# EAGLE board MainBoard_scheme (EAGLE 9.5.2)
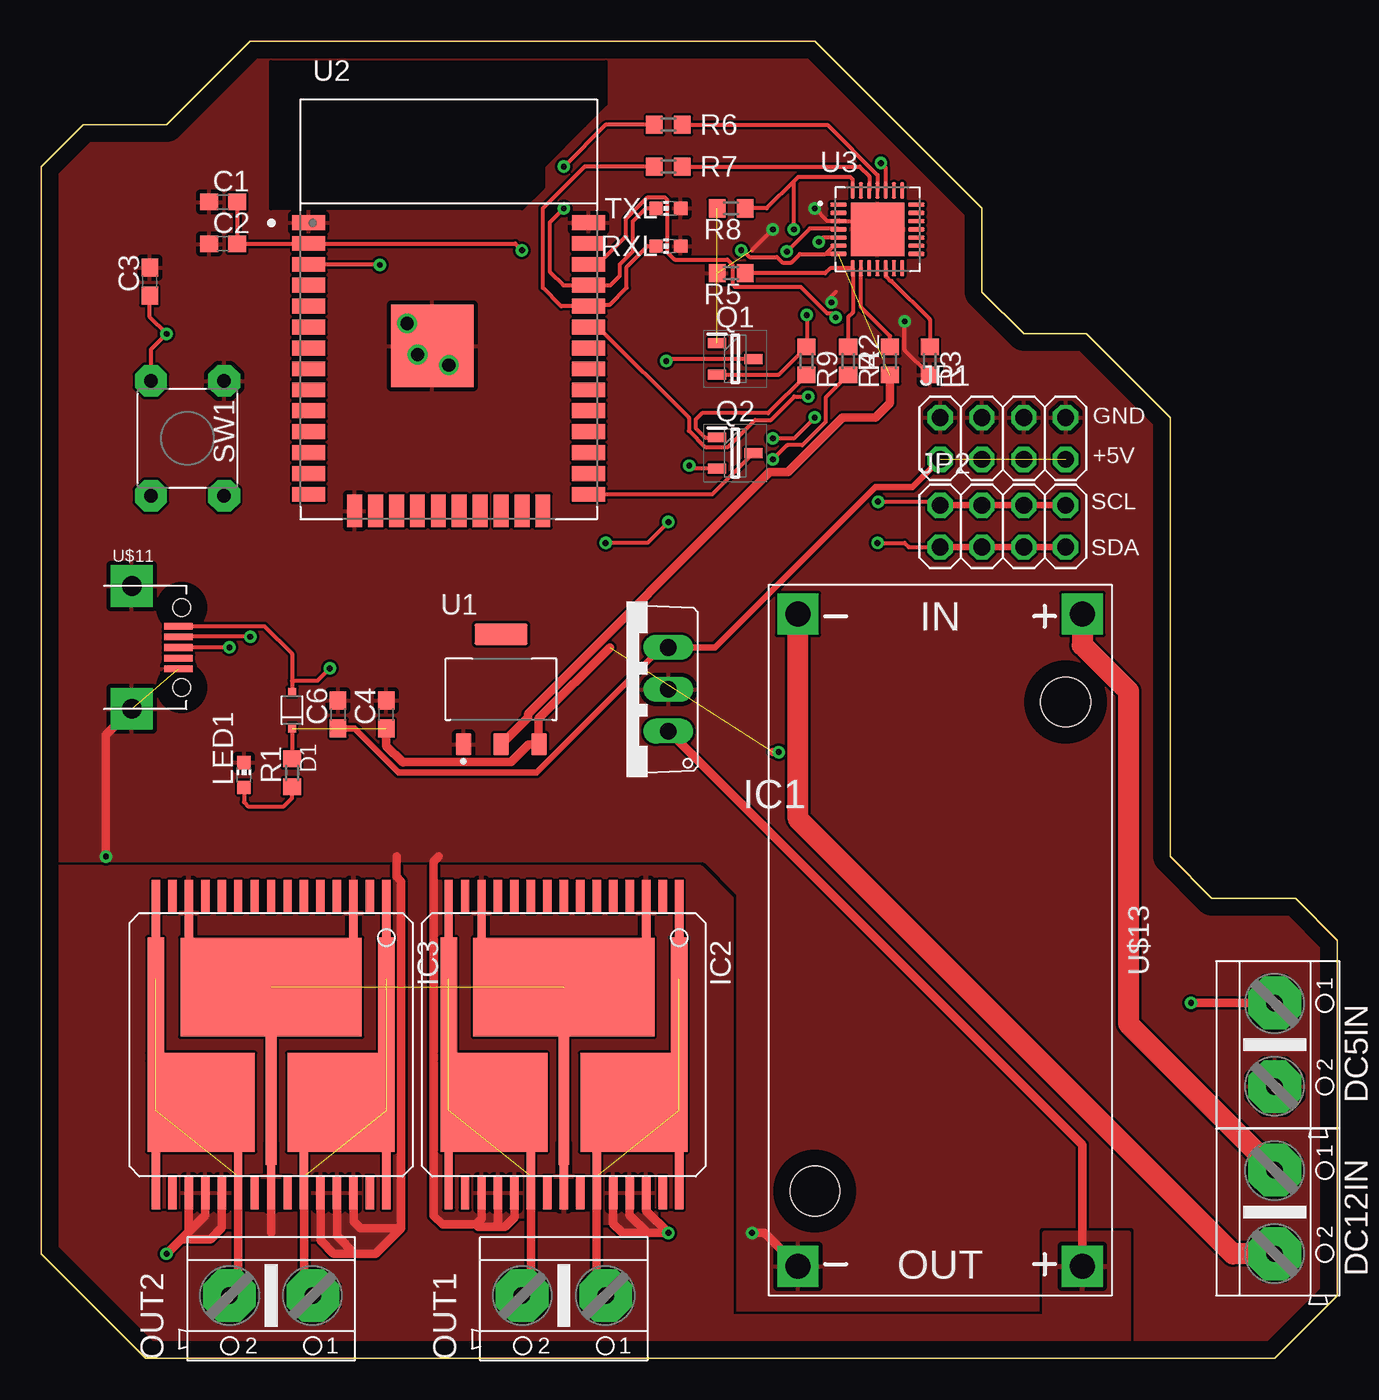
[diagram p0: board, top side]
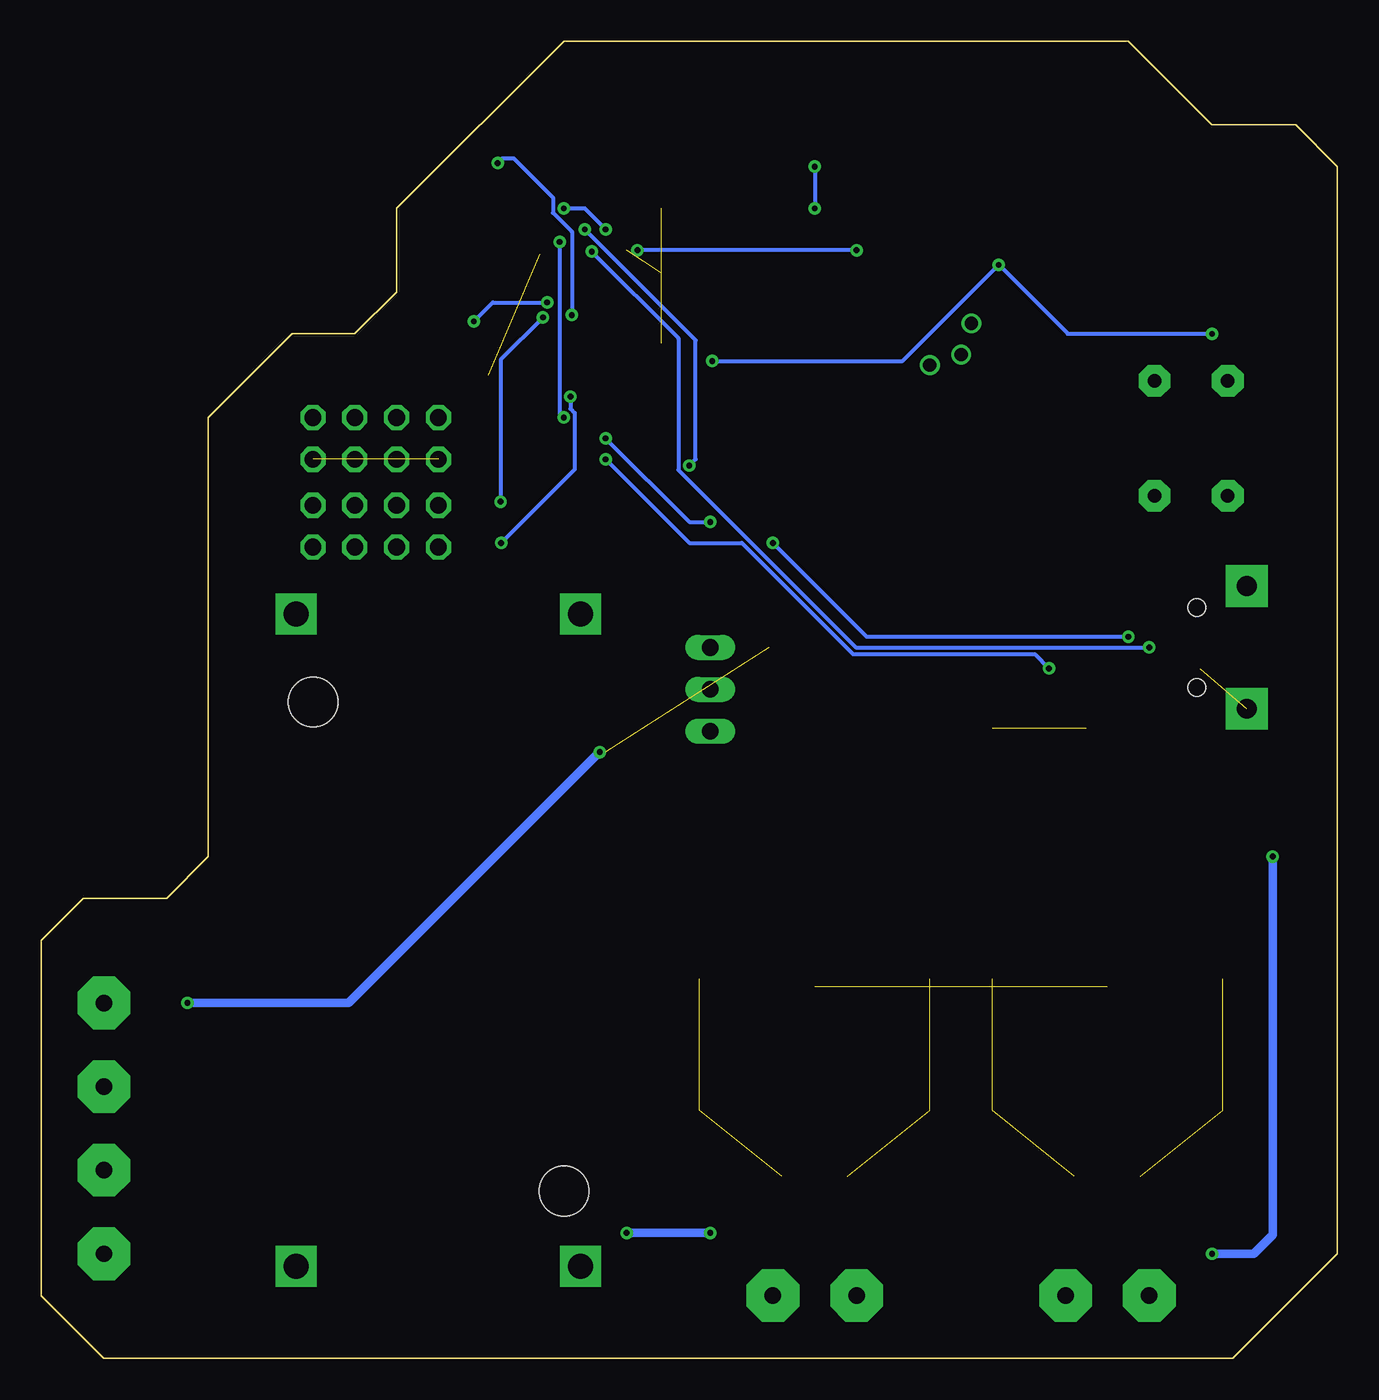
[diagram p1: board, bottom side, seen from below]

Size 78.74 x 80.01 mm. Coordinates in mm from the lower left corner, seen from the top.
Outline: 0,6.35 6.35,0 74.93,0 78.74,3.81 78.74,25.4 76.2,27.94 71.12,27.94 68.58,30.48 68.58,57.15 63.5,62.23 59.69,62.23 57.15,64.77 57.15,69.85 46.99,80.01 12.7,80.01 7.62,74.93 2.54,74.93 0,72.39 0,6.35
Copper layers (1*16): Top 0.035mm / dielectric 1.5mm / Bottom 0.035mm
Design rules "default": minimum track width 6mil, minimum drill 0.35mm, track to track 6mil, track to pad 6mil, pad to pad 6mil, via to via 6mil, smd to smd 6mil, copper to edge 40mil, drill to drill 6mil, minimum pad ring 10mil, minimum via ring 8mil, stop-mask expansion 4mil, vias tented up to drill 0mil, thermal gap 10mil
tRestrict: area 14,69.9 to 34.3,78.7

## Footprints (pad centres in the part's own frame; a part is rotated, then mirrored left to right if it is on the bottom)
C0603 = smd 1.1 x 1: 1 -0.85,0; 2 0.85,0
SOD323(F) = smd 0.5 x 0.5: 1 1.1,0; 2 -1.1,0
ARK500/2 = drill 1 pad 3.2 octagon: 1 -2.54,0; 2 2.54,0
TO220V = drill 1.016 long: 1 -2.54,-2.54; 2 0,-2.54; 3 2.54,-2.54
MULTIPOWERSO-30 = smd 0.508 x 12: 1 -7,-4; 15 7,-4; 16 7,4; 30 -7,4 | smd 0.508 x 2: 2 -6,-9; 4 -4,-9; 5 -3,-9; 6 -2,-9; 7 -1,-9; 8 0,-9; 9 1,-9; 10 2,-9; 11 3,-9; 12 4,-9; 14 6,-9; 17 6,9; 18 5,9; 19 4,9; 20 3,9; 22 1,9; 24 -1,9; 26 -3,9; 27 -4,9; 28 -5,9; 29 -6,9 | smd 0.508 x 4: 3 -5,-8; 13 5,-8; 21 2,8; 23 0,8; 25 -2,8 | smd 6.5 x 6: OUTA -4.25,3.5; OUTB 4.25,3.5 | smd 1 x 7.5: OUTA@1 -7,-2.755; OUTB@1 7,-2.755 | smd 11 x 6: VCC 0,-3.5 | smd 0.65 x 8.3: VCC@1 0,3.145
2X04 = drill 1.016 octagon: 1 -3.81,-1.27; 2 -3.81,1.27; 3 -1.27,-1.27; 4 -1.27,1.27; 5 1.27,-1.27; 6 1.27,1.27; 7 3.81,-1.27; 8 3.81,1.27
CHIP-LED0603 = smd 0.8 x 0.8: A 0,-0.75; C 0,0.75
SOT95P240X115-3N = smd 1.1 x 0.6: 1 -1.1,0.95; 2 -1.1,-0.95; 3 1.1,0
R0603 = smd 1 x 1.1: 1 -0.85,0; 2 0.85,0
P-B1720 = drill 0.813 pad 1.93 octagon: 1 -3.493,-2.223; 2 -3.493,2.223; 3 3.493,-2.223; 4 3.493,2.223
SOT229P700X180-4N = smd 0.93 x 1.31: 1 -2.29,-3.345; 2 0,-3.345; 3 2.29,-3.345 | smd 3.24 x 1.31: 4 0,3.345
MODULE_ESP32-WROOM-32D = smd 2 x 0.9: 1 -8.5,5.26; 2 -8.5,3.99; 3 -8.5,2.72; 4 -8.5,1.45; 5 -8.5,0.18; 6 -8.5,-1.09; 7 -8.5,-2.36; 8 -8.5,-3.63; 9 -8.5,-4.9; 10 -8.5,-6.17; 11 -8.5,-7.44; 12 -8.5,-8.71; 13 -8.5,-9.98; 14 -8.5,-11.25; 25 8.5,-11.25; 26 8.5,-9.98; 27 8.5,-8.71; 28 8.5,-7.44; 29 8.5,-6.17; 30 8.5,-4.9; 31 8.5,-3.63; 32 8.5,-2.36; 33 8.5,-1.09; 34 8.5,0.18; 35 8.5,1.45; 36 8.5,2.72; 37 8.5,3.99; 38 8.5,5.26 | smd 0.9 x 2: 15 -5.715,-12.25; 16 -4.445,-12.25; 17 -3.175,-12.25; 18 -1.905,-12.25; 19 -0.635,-12.25; 20 0.635,-12.25; 21 1.905,-12.25; 22 3.175,-12.25; 23 4.445,-12.25; 24 5.715,-12.25 | smd 5 x 5: 39 -1,-2.24
QFN50P500X500X80-29N = smd 1.01 x 0.27: 1 -2.36,1.5; 2 -2.36,1; 3 -2.36,0.5; 4 -2.36,0; 5 -2.36,-0.5; 6 -2.36,-1; 7 -2.36,-1.5; 15 2.36,-1.5; 16 2.36,-1; 17 2.36,-0.5; 18 2.36,0; 19 2.36,0.5; 20 2.36,1; 21 2.36,1.5 | smd 0.27 x 1.01: 8 -1.5,-2.36; 9 -1,-2.36; 10 -0.5,-2.36; 11 0,-2.36; 12 0.5,-2.36; 13 1,-2.36; 14 1.5,-2.36; 22 1.5,2.36; 23 1,2.36; 24 0.5,2.36; 25 0,2.36; 26 -0.5,2.36; 27 -1,2.36; 28 -1.5,2.36 | smd 3.25 x 3.25: 29 0,0
MICRO-USB = smd 0.4 x 1.75: 1 -1.3,4.525; 2 -0.65,4.525; 3 0,4.525; 4 0.65,4.525; 5 1.3,4.525 | drill 1.2 pad 2.54 square: GND1 -3.725,1.7; GND2 3.725,1.7 | hole 1.05: -2.425,4.73; 2.425,4.73
DC-DC-STEP-DOWN-LM2596 = drill 1.5 pad 2.5 square: IN+ -19.812,8.636; IN- -19.812,-8.636; OUT+ 19.812,8.636; OUT- 19.812,-8.636 | hole 3: -14.478,7.62; 15.24,-7.62

## Placement (x,y rotation side)
C1  0.1uF/50V  [C0603]  11.05,70.23 0 top
C2  4.7uF/6.3V  [C0603]  11.05,67.69 0 top
C3  0.1uF/50V  [C0603]  6.6,65.41 90 top
C4  22uF/10V  [C0603]  20.95,39.12 90 top
C6  0.1uF/50v  [C0603]  18.03,39.12 90 top
D1  BAT760  [SOD323(F)]  15.24,39.37 270 top
DC5IN  +5V  [ARK500/2]  74.93,19.05 270 top
DC12IN  +12V  [ARK500/2]  74.93,8.89 270 top
IC1  7805TV  [TO220V]  35.56,40.64 90 top
IC2  VNH3SP30  [MULTIPOWERSO-30]  31.75,19.05 180 top
IC3  VNH3SP30  [MULTIPOWERSO-30]  13.97,19.05 180 top
JP1  [2X04]  58.42,55.88 0 top
JP2  [2X04]  58.42,50.55 0 top
LED1  [CHIP-LED0603]  12.32,35.43 0 top
OUT1  ARK500/2  [ARK500/2]  31.75,3.81 180 top
OUT2  ARK500/2  [ARK500/2]  13.97,3.81 180 top
Q1  SS8050-G  [SOT95P240X115-3N]  42.16,60.71 0 top
Q2  SS8050-G  [SOT95P240X115-3N]  42.16,54.99 0 top
R1  2K  [R0603]  15.24,35.56 90 top
R2  2K  [R0603]  51.56,60.58 90 top
R3  10K  [R0603]  53.98,60.58 270 top
R4  10K  [R0603]  49.02,60.58 270 top
R5  10K  [R0603]  41.91,65.91 180 top
R6  0R  [R0603]  38.1,74.93 0 top
R7  0R  [R0603]  38.1,72.39 0 top
R8  10K  [R0603]  41.91,69.85 180 top
R9  10K  [R0603]  46.48,60.58 270 top
RXL  [CHIP-LED0603]  38.1,67.56 90 top
SW1  P-B1720  [P-B1720]  8.89,55.88 270 top
TXL  [CHIP-LED0603]  38.1,69.85 90 top
U1  AMS1117-3.3  [SOT229P700X180-4N]  27.94,40.64 0 top
U2  ESP32-WROOM-32D  [MODULE_ESP32-WROOM-32D]  24.76,63.73 0 top
U3  CP2102N-A01-GQFN28  [QFN50P500X500X80-29N]  50.8,68.58 0 top
U$11  MICRO-USB  [MICRO-USB]  3.81,43.18 270 top
U$13  DC-DC-STEP-DOWN-LM2596  [DC-DC-STEP-DOWN-LM2596]  54.61,25.4 270 top

## Library data of the parts
C1-C4 C6 = rcl; SPICEPREFIX: C
D1 = nxp_60_1_1
DC5IN DC12IN OUT1 OUT2 = #PaJa_konektory
IC1 = linear
IC2 IC3 = st-microelectronics; MPN: VNH3SP30-E; OC_FARNELL: 1739420; OC_NEWARK: 33R1486
JP1 JP2 = pinhead
LED1 RXL TXL = led
Q1 Q2 = SS8050-G; AVAILABILITY: Unavailable; DESCRIPTION: Bipolar _BJT_ Transistor NPN 25V 1.5A 100MHz 300mW Surface Mount SOT-23; MF: Comchip Technology; MP: SS8050-G; PACKAGE: TO-236 Comchip; PRICE: None
R1-R9 = rcl; SPICEPREFIX: R
SW1 = #PaJa_prepinace
U1 = AMS1117-3.3; AVAILABILITY: Unavailable; DESCRIPTION: Sot-89; MF: Advanced Monolithic Systems; MP: AMS1117-3.3; PACKAGE: SOT-89 ams; PRICE: None
U2 = ESP32-WROOM-32D; AVAILABILITY: Unavailable; DESCRIPTION: Bluetooth, WiFi 802.11b/g/n, Bluetooth v4.2 + EDR, Class 1, 2 and 3 Transceiver Module 2.4GHz ~ 2.5GHz Integrated, Trace Surface Mount; MF: Espressif Systems; MP: ESP32-WROOM-32D; PACKAGE: Module Espressif Systems; PRICE: None
U3 = CP2102N-A01-GQFN28; AVAILABILITY: Unavailable; DESCRIPTION: USB Bridge, USB to UART USB 2.0 UART Interface 28-QFN _5x5_; MF: Silicon Labs; MP: CP2102N-A01-GQFN28; PACKAGE: QFN-28 Silicon Labs; PRICE: None
U$11 = microusb
U$13 = diy-modules

## Nets
+3V3: C1.2 C2.2 R2.1 U1.2 U2.2 U3.6 U3.7
+5V: C6.1 IC1.3 JP1.1 JP1.3 JP1.5 JP1.7
+12V: IC1.1 IC2.3 IC2.13 IC2.23 IC3.3 IC3.13 IC3.23 U$13.OUT+
CTS: U3.23
DCD: U3.1
DIAGA1: IC2.6
DIAGA2: IC3.6
DIAGB1: IC2.10
DIAGB2: IC3.10
DSR: U3.27
DTR: Q2.2 R8.1 U3.28
EN: C3.1 Q1.3 SW1.1 U2.3
EXT_5V: C4.1 D1.1 DC5IN.1 R1.2 U1.3
GND: C1.1 C2.1 C3.2 C4.2 C6.2 DC5IN.2 IC1.2 IC2.18 IC2.19 IC2.20 IC2.26 IC2.27 IC2.28 IC3.18 IC3.19 IC3.20 IC3.26 IC3.27 IC3.28 JP1.2 JP1.4 JP1.6 JP1.8 LED1.C R3.2 R5.2 RXL.A SW1.2 TXL.A U1.1 U2.1 U2.15 U2.38 U2.39 U3.3 U3.29 U$11.5 U$11.GND1 U$11.GND2 U$13.OUT-
GNDA: DC12IN.2 U$13.IN-
I2C_SCL: JP2.2 JP2.4 JP2.6 JP2.8 U2.36
I2C_SDA: JP2.1 JP2.3 JP2.5 JP2.7 U2.33
INA1: IC2.5
INA2: IC3.5
INB1: IC2.11
INB2: IC3.11
IO0: Q2.3 U2.25
IO2: U2.24
IO4: U2.26
IO5: U2.29
IO12: U2.14
IO13: U2.16
IO14: U2.13
IO15: U2.23
IO16: U2.27
IO17: U2.28
IO18: U2.30
IO19: U2.31
IO23: U2.37
IO25: U2.10
IO26: U2.11
IO27: U2.12
IO32: U2.8
IO33: U2.9
IO34: U2.6
IO35: U2.7
N$1: R2.2 U3.9
N$2: Q1.1 R8.2
N$6: Q2.1 R9.2
N$7: LED1.A R1.1
N$9: R3.1 U3.12
N$10: R4.1 R5.1 U3.8
OUTA1: IC2.1 IC2.25 IC2.30 OUT1.1
OUTA2: IC3.1 IC3.25 IC3.30 OUT2.1
OUTB1: IC2.15 IC2.16 IC2.21 OUT1.2
OUTB2: IC3.15 IC3.16 IC3.21 OUT2.2
PWM_1: IC2.8
PWM_2: IC3.8
RI/CLK: U3.2
RTS: Q1.2 R9.1 U3.24
RXD: R6.2 U3.25
RXD0: R7.1 RXL.C U2.34
TXD: R7.2 U3.26
TXD0: R6.1 TXL.C U2.35
USB_DN: U3.5 U$11.2
USB_DP: U3.4 U$11.3
VBUS: D1.2 R4.2 U$11.1
VCC: IC2.VCC IC2.VCC@1 IC3.VCC IC3.VCC@1
VDD: DC12IN.1 U$13.IN+

## Tracks (layer width: path | path; a pad name or v marks a point on that pad's centre or on a via)
+3V3  (via drill 0.35)  (1 unrouted)
  Top 0.254: U3.6 48.15,67.58 47.65,67.08 | U3.7 48.26,67.08 47.65,67.08 | C1.2 C2.2 16.23,67.69 U2.2 28.8,67.72 v29.21,67.31 | v42.52,67.31 42.6,67.31 43.01,66.9 44.69,66.9 45.02,66.57 45.57,66.57 46.08,67.08 47.65,67.08
  Top 0.508: U1.2 29.57,38.92 29.57,39.14 44.26,53.82 45.35,53.82 48.67,57.15 50.67,57.15 51.56,58.04 R2.1
  Bottom 0.254: v29.21,67.31 v42.52,67.31
+5V  (3 unrouted)
  Top 0.406: JP1.1 52.93,52.93 50.69,52.93 40.94,43.18 IC1.3 37.7,43.18 30.1,35.58 21.72,35.58 19.04,38.27 C6.1
+12V
  Top 0.508: IC3.23 13.97,7.62 | IC1.1 63.25,12.95 U$13.OUT+
  pour Top (rank 2): -1.27,29.84 40.01,29.84 41.91,27.94 41.91,2.54 60.96,2.54 60.96,7.62 66.04,7.62 66.04,0 40.64,0 38.1,-2.54 -1.27,-2.54
DTR  (via drill 0.35)
  Top 0.254: U3.28 49.3,71.6 49.15,71.76 45.97,71.76 45.72,71.5 | R8.1 44.07,69.85 45.72,71.5 | Q2.2 39.56,54.04 v39.37,54.23 | v45.72,68.58 45.72,71.5
  Bottom 0.254: v39.37,54.23 38.99,54.61 38.99,61.85 v45.72,68.58
EN  (via drill 0.35)
  Top 0.254: Q1.3 38.1,60.71 v37.97,60.58 | v20.57,66.42 16.29,66.42 U2.3 | SW1.1 6.67,61.28 v7.62,62.23 6.6,63.25 C3.1
  Bottom 0.254: v37.97,60.58 26.42,60.58 v20.57,66.42 16.38,62.23 v7.62,62.23
EXT_5V  (via drill 0.35)  (2 unrouted)
  Top 0.254: D1.1 R1.2
  Top 0.406: D1.1
  Top 0.508: 34.54,43.18 30.23,38.86 U1.3 29.59,37.29 28.53,36.23 22.01,36.23 21.97,36.2 20.95,37.21 C4.1 | 44.45,36.83 v44.81,36.83 | v69.85,21.59 DC5IN.1
  Bottom 0.508: v44.81,36.83 60.05,21.59 v69.85,21.59
GND  (via drill 0.35)  (2 unrouted)
  Top 0.254: U3.29 50.3,69.08 U3.3 47.76,69.08 v46.99,69.85 | v44.45,68.58 43.18,67.31 | R3.2 52.45,61.25 v52.45,62.99 | v48.01,64.14 48.01,64.52 48.26,64.77
  Top 0.508: IC3.26 16.97,7.16 17.78,6.35 19.05,6.35 | 19.05,6.35 20.32,6.35 21.88,7.91 | 21.59,30.48 21.59,29.26 21.88,28.97 21.88,7.91 | IC3.27 17.97,7.43 19.05,6.35 | IC3.28 18.97,8.34 19.4,7.91 21.88,7.91 | IC3.18 8.97,7.7 | 8.97,7.7 8.57,7.3 | 8.57,7.3 v7.62,6.35 | v3.93,30.48 3.93,37.88 U$11.GND2 | IC3.19 9.97,8.7 8.97,7.7 | IC3.20 10.97,7.92 10.29,7.24 8.64,7.24 8.57,7.3 | IC2.18 26.75,8.46 26.42,8.13 | 26.42,8.13 24.38,8.13 23.84,8.67 23.84,30.19 24.13,30.48 | 26.42,8.13 26.54,8 27.56,8 | 27.56,8 27.75,8.19 IC2.19 | 27.56,8 28.19,8 28.75,8.56 IC2.20 | IC2.26 34.75,8.18 35.31,7.62 36.83,7.62 | 36.83,7.62 v38.1,7.62 36.75,8.97 IC2.28 | v43.18,7.62 43.94,7.62 U$13.OUT- | IC2.27 35.75,8.7 36.83,7.62
  Bottom 0.254: v46.99,69.85 45.72,69.85 v44.45,68.58 | v52.45,62.99 51.31,64.14 v48.01,64.14
  Bottom 0.508: v7.62,6.35 5.08,6.35 3.93,7.5 v3.93,30.48 | v38.1,7.62 v43.18,7.62
  pour Top (rank 6): -1.27,80.01 83.82,80.01 83.82,-2.54 -1.27,-2.54
GNDA
  Top 1.27: U$13.IN- 45.97,32.77 72.39,6.35 DC12IN.2
I2C_SCL  (via drill 0.35)
  Top 0.254: v48.26,63.23 48.01,63.48 47.73,63.48 46.13,65.08 42.14,65.08 41.98,65.25 41.98,66.44 41.68,66.74 38.48,66.74 38.03,67.19 38.03,70.37 37.87,70.53 36.83,70.53 35.53,69.23 35.53,68.15 33.84,66.45 U2.36 | v50.83,52.04 54.39,52.04 JP2.2
  Top 0.406: JP2.2 JP2.4 JP2.6 JP2.8
  Bottom 0.254: v48.26,63.23 50.83,60.65 v50.83,52.04
I2C_SDA  (via drill 0.35)
  Top 0.254: v46.59,58.42 45.75,58.42 44.32,57 43.37,57 41.73,55.36 40.33,55.36 39.34,56.35 39.34,57.13 33.84,62.64 U2.33 | v50.8,49.53 52.45,49.53 52.7,49.28 JP2.1
  Top 0.406: JP2.1 JP2.3 JP2.5 JP2.7
  Bottom 0.254: v46.59,58.42 46.59,57.68 46.33,57.42 46.33,54 v50.8,49.53
IO0
  Top 0.254: Q2.3 40.75,52.48 U2.25
N$1
  Top 0.254: R2.2 51.56,62.1 49.8,63.87 U3.9
N$2  (1 unrouted)
N$4  (via drill 0.8)
  other vias: 22.86,60.96
N$5  (via drill 0.8)
  other vias: 24.77,60.32
N$6
  Top 0.254: R9.2 44.16,57.4 40.13,57.4 39.75,57.02 39.75,56.51 40.32,55.94 Q2.1
N$7
  Top 0.254: LED1.A 12.32,33.78 12.57,33.53 14.73,33.53 15.24,34.04 R1.1
N$8  (via drill 0.8)
  other vias: 22.22,62.87
N$9
  Top 0.254: U3.12 51.3,65.72 51.59,65.44 51.66,65.44 53.98,63.12 R3.1
N$10
  Top 0.254: R4.1 49.02,63.25 49.3,63.52 U3.8 47.93,66.22 47.62,65.91 R5.1
OUTA1  (2 unrouted)
  Top 0.508: IC2.25 33.75,4.35 OUT1.1
OUTA2  (2 unrouted)
  Top 0.508: IC3.25 15.97,4.35 OUT2.1
OUTB1  (2 unrouted)
  Top 0.508: IC2.21 29.75,4.35 OUT1.2
OUTB2  (2 unrouted)
  Top 0.508: IC3.21 11.97,4.35 OUT2.2
RTS  (via drill 0.35)
  Top 0.254: Q1.2 44.81,59.76 R9.1 46.51,61.45 v46.51,63.37 | U3.24 51.3,72.31 v51.01,72.6
  Bottom 0.254: v51.01,72.6 50.71,72.9 50.04,72.9 47.65,70.51 47.65,69.58 46.51,68.44 v46.51,63.37
RXD
  Top 0.254: R6.2 47.75,74.93 50.8,71.88 U3.25
RXD0
  Top 0.254: R7.1 33.02,72.39 30.48,69.85 30.48,65.02 31.59,63.91 U2.34 33.36,64.01 34.54,64.01 35.56,65.02 35.56,66.29 36.83,67.56 RXL.C
TXD
  Top 0.254: R7.2 49.72,72.39 50.3,71.81 U3.26
TXD0  (via drill 0.35)
  Top 0.254: R6.1 34.29,74.93 v31.75,72.39 | v31.75,69.85 30.89,68.99 30.89,66.02 31.72,65.18 U2.35 34.57,65.18 35.15,65.76 35.15,66.46 35.94,67.25 35.94,69.06 36.73,69.85 TXL.C
  Top 0.508: 34.03,65.18 U2.35
  Bottom 0.254: v31.75,72.39 v31.75,69.85
USB_DN  (via drill 0.35)
  Top 0.254: U3.5 47.51,68.08 v47.24,67.82 | v46.99,57.15 45.72,55.88 v44.45,55.88 | v38.1,50.8 36.83,49.53 v34.29,49.53 | v12.7,43.84 8.34,43.84 U$11.2
  Bottom 0.254: v47.24,67.82 47.24,57.4 v46.99,57.15 | v44.45,55.88 39.37,50.8 v38.1,50.8 | v34.29,49.53 28.6,43.84 v12.7,43.84
USB_DP  (via drill 0.35)
  Top 0.254: U3.4 48.4,68.62 46.69,68.62 v45.3,67.23 | v11.43,43.18 U$11.3
  Bottom 0.254: v45.3,67.23 40.03,61.96 40.03,53.96 29.25,43.18 v11.43,43.18
VBUS  (via drill 0.35)
  Top 0.254: U$11.1 13.56,44.48 15.24,42.8 15.24,41.15 | 15.24,41.15 D1.2 | R4.2 47.65,58.35 47.65,56.88 46.24,55.47 45.31,55.47 v44.45,54.61 | v17.53,41.91 16.76,41.15 15.24,41.15
  Bottom 0.254: v44.45,54.61 39.37,49.53 36.18,49.53 29.42,42.77 18.39,42.77 v17.53,41.91
VCC  (1 unrouted)
  Top 0.508: IC3.VCC IC3.VCC@1 | IC2.VCC IC2.VCC@1
VDD
  Top 1.27: U$13.IN+ 63.25,43.32 66.04,40.52 66.04,20.32 DC12IN.1

## Text on the board
tNames: GND | +5V | SCL | SDA